# Altium PCB PCB1.PcbDoc
Units mil, origin at the board's own origin, x right, y up, seen from the top; angles counter-clockwise.
Board outline 3990 x 2370 mil, 2 copper layers (Top Layer, Bottom Layer); 9 components, 7 nets, 25 pads, 0 vias.
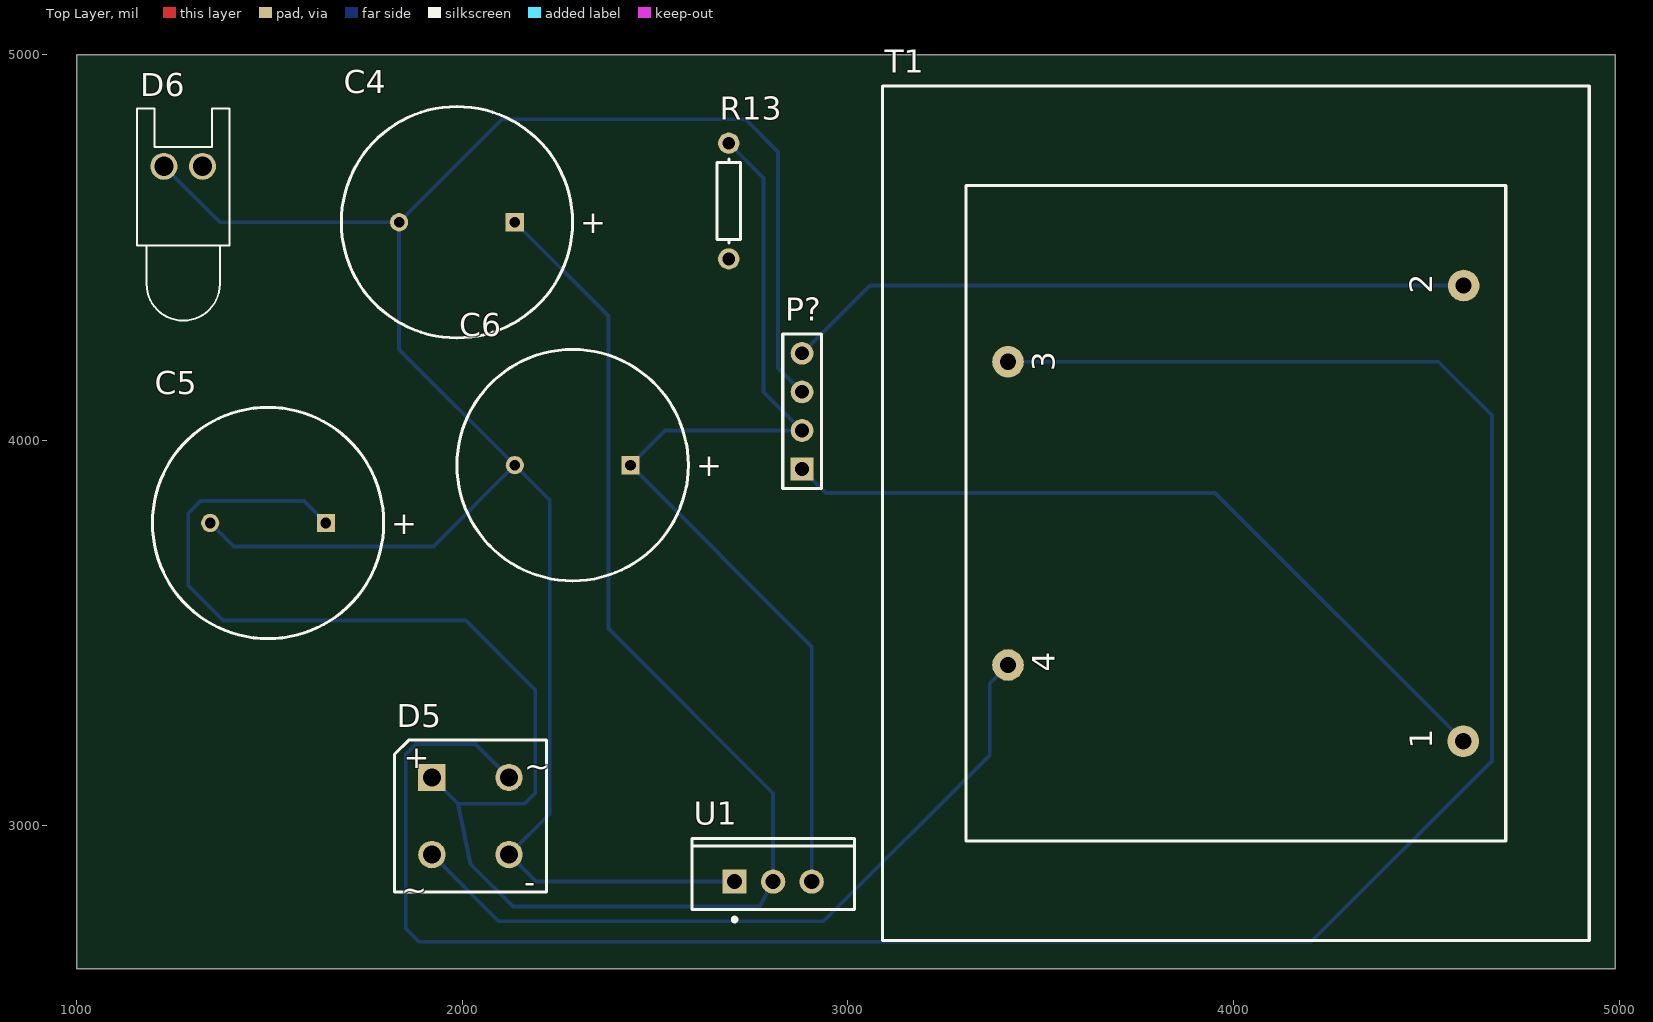
[diagram p0: Top Layer view]
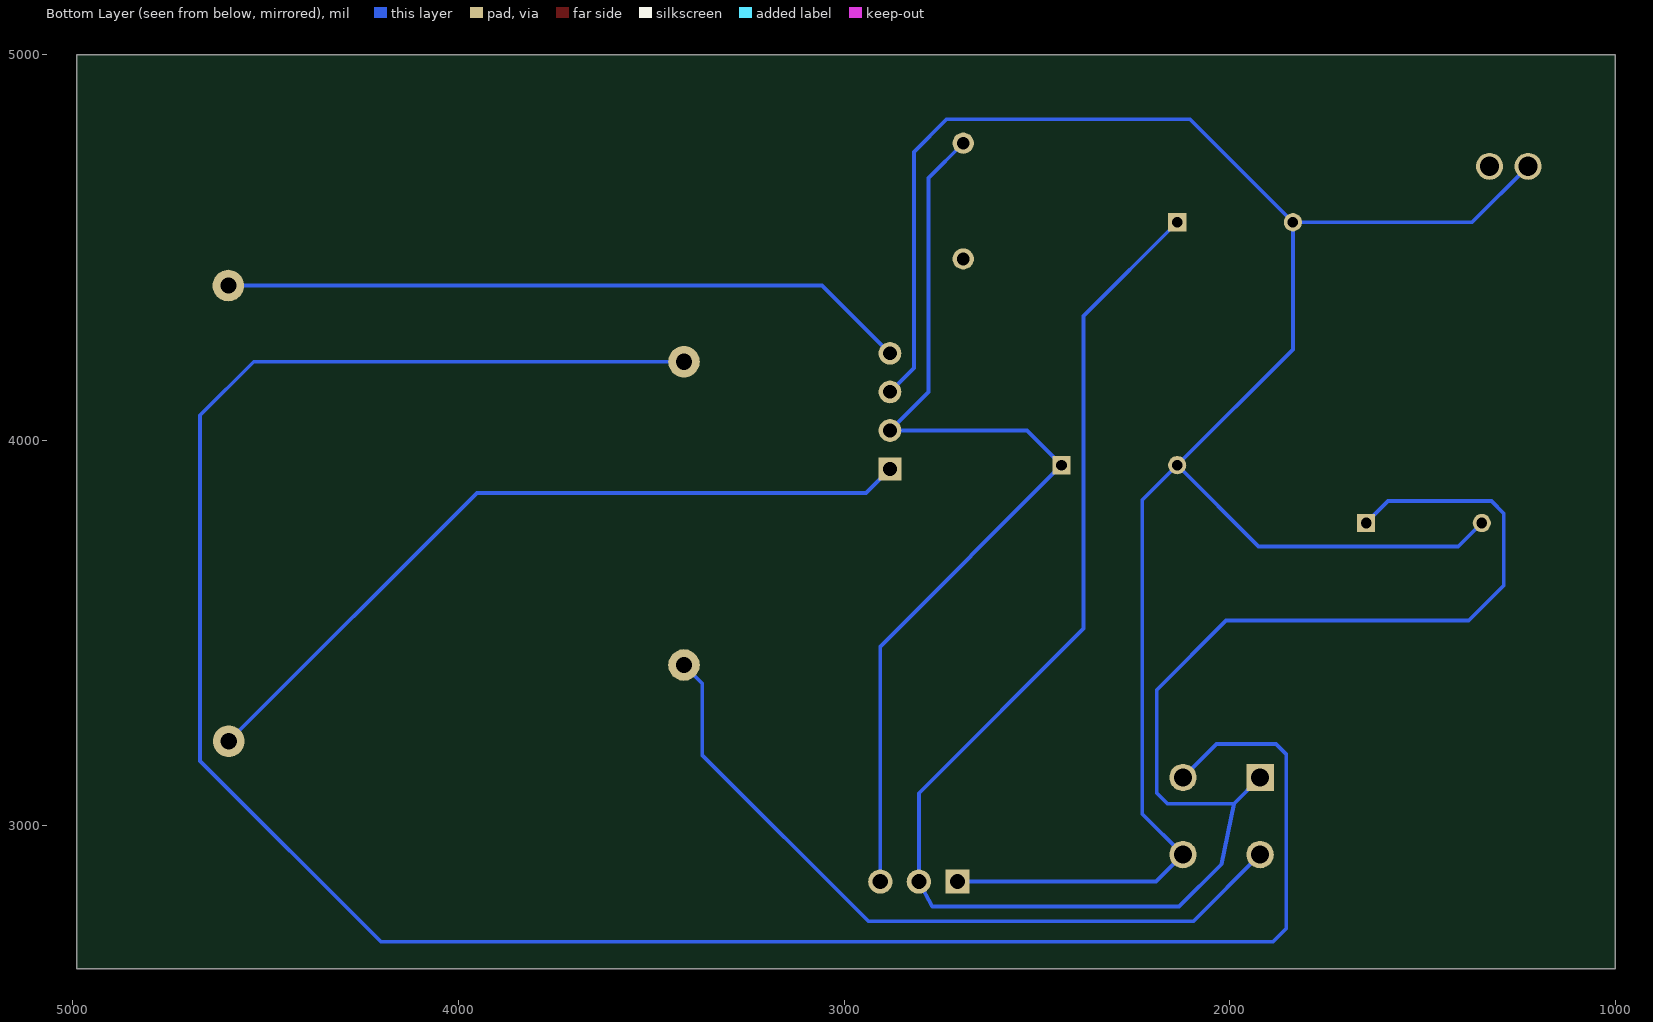
[diagram p1: Bottom Layer view, seen from below]

## Layer stack, top to bottom
Top Solder: solder mask 0.4, Solder Resist, Dk 3.5
Top Layer: signal copper 1.4
Dielectric 1: dielectric 12.6, FR-4, Dk 4.8
Bottom Layer: signal copper 1.4
Bottom Solder: solder mask 0.4, Solder Resist, Dk 3.5

## Board outline
1000,2630 4990,2630 4990,5000 1000,5000

## Design rules (kind name [scope] priority, off if disabled: settings)
Clearance [All] p1: gap=27.56 ignorepadtopadclearanceinfootprint=FALSE
PolygonConnect [All] p1: connectstyle=Direct reliefconductorwidth=10 reliefentries=4 polygonreliefangle="90 Angle" airgapwidth=10
RoomDefinition Sheet1 [InComponentClass('Sheet1')] p1: confinementstyle=ConfineIn formatcopy=TRUE lockcomponents=FALSE outline 1036,2620.67 4991,2620.67 4991,5003.38 1036,5003.38
RoutingLayers [All] p1: top layer_v5=FALSE bottom layer_v5=TRUE
RoutingVias [All] p1: holewidth=28 width=50 viastyle="Through Hole" minholewidth=28 minwidth=50 maxholewidth=28 maxwidth=50
SolderMaskExpansion [All] p1: expansion=4 istentingtop=FALSE
Width [All] p1: maxlimit=10 minlimit=10 preferedwidth=10
29 further rules are at their usual default settings.

## Components (designator, comment, footprint, x,y, rotation, side; value= is the part's Value field where it differs from the comment)
C4 "Cap Pol1" RB7.6-15 1986,4565.67 r0 top value=0.1uF
C5 "Cap Pol1" RB7.6-15 1496,3785.67 r0 top value=470uF
C6 "Cap Pol1" RB7.6-15 2286,3935.67 r0 top value=0.1uF
D5 "Bridge1" D-38 2021,3025.67 r0 top
D6 "LED0" LED-0 1276,4710.67 r0 top
P? "Header 4" HDR1X4 2881,3925.67 r90 top
R13 "Res1" AXIAL-0.3 2691,4620.67 r90 top value=4.7k
T1 "Trans Cupl" TRF_4 4006,3810.67 r90 top
U1 "LM7905CT/NOPB" NDE0003A 2806,2855.67 r0 top

## Footprints (in the part's own frame and the unit in brackets; to place one, negate y for a bottom-side part, rotate by r counter-clockwise, add the part's x,y. Pads: shape width x height; smd on the part's side, far side on the other; paste and mask are expansions set on the pad)
AXIAL-0.3 [mm] "Axial Device, Thru-Hole; 2 Leads; 0.3 in Pin Spacing"
  round 1.4 hole 0.85: 1(-3.81,0) 2(3.81,0)
  silkscreen extent -2.77,-0.76 2.77,0.76
D-38 [mm] "Bridge Rectifier; 4 Terminals; Body 9.4 x 9.4 mm (typ); Pitch 5.08 mm"
  rect 1.8x1.8 hole 1.2: 1(-2.54,2.54)
  round 1.8 hole 1.2: 2(-2.54,-2.54) 3(2.54,-2.54) 4(2.54,2.54)
  silkscreen extent -5,-5 5,5, body extent -5,-5 5,5, height 9.91
HDR1X4 [mm] "Connector; Header; 4 Position"
  rect 1.5x1.5 hole 0.9: 1(0,0)
  round 1.5 hole 0.9: 2(2.54,0) 3(5.08,0) 4(7.62,0)
  silkscreen extent -1.27,-1.27 8.89,1.27
LED-0 [mil] "LED; 2 Leads"
  round 70 hole 50: 1(50,0) 2(-50,0)
  silkscreen extent -120,-400 120,150
NDE0003A [mm] "FM, 3-Leads, Body 10.7x4.7mm, Pitch 2.54mm"
  rect 1.6x1.6 hole 1: 1(-2.54,0)
  round 1.6 hole 1: 2(0,0) 3(2.54,0)
  silkscreen extent -5.35,-2.62 5.35,2.85, body extent -5.4,-1.9 5.4,2.9, height 19.4
RB7.6-15 [mm] "Polarized Capacitor (Radial); 2 Leads"
  rect 1.2x1.2 hole 0.7: 1(3.81,0)
  round 1.2 hole 0.7: 2(-3.81,0)
  silkscreen extent -7.62,-7.62 7.62,7.62
TRF_4 [mil] "Transformer; 4 Leads"
  round 82 hole 42: 1(-590.83,-590) 2(590.83,-590.83) 3(393.33,590.83) 4(-393.33,590.83)
  silkscreen extent -1108,-917 1108,917

## Part data
C4 C5 C6: "Polarized Capacitor (Radial)", LatestRevisionDate=17-Jul-2002, LatestRevisionNote="Re-released for DXP Platform.", PackageDescription="Polarized Capacitor (Radial); 2 Leads", PackageReference=RB7.6-15, Published=8-Jun-2000, Publisher="Altium Limited"
D5: "Full Wave Diode Bridge", DatasheetVersion=E2732B, LatestRevisionDate=29-May-2009, LatestRevisionNote="Sch pins A & K swapped.", PackageDescription="Bridge Rectifier; 4 Terminals; Body 9.4 x 9.4 mm (typ); Pitch 5.08 mm", PackageReference=D-38, Published=8-Jun-2000, Publisher="Altium Limited"
D6: "Typical INFRARED GaAs LED", LatestRevisionDate=08-Jul-2005, LatestRevisionNote="Mech Layer 1 removed.", PackageDescription="LED; 2 Leads", PackageReference=LED-0, Published=8-Jun-2000, Publisher="Altium Limited"
P?: "Header, 4-Pin", LatestRevisionDate=17-Jul-2002, LatestRevisionNote="Re-released for DXP Platform.", Publisher="Altium Limited"
R13: "Resistor", LatestRevisionDate=17-Jul-2002, LatestRevisionNote="Re-released for DXP Platform.", PackageDescription="Axial Device, Thru-Hole; 2 Leads; 0.3 in Pin Spacing", PackageReference=AXIAL-0.3, Published=8-Jun-2000, Publisher="Altium Limited"
T1: "Transformer (Coupled Inductor Model)", LatestRevisionDate=17-Jul-2002, LatestRevisionNote="Re-released for DXP Platform.", PackageDescription="Transformer; 4 Leads", PackageReference=TRF_4, Published=8-Jun-2000, Publisher="Altium Limited"
U1: library part CMP-0062-02481-3, "3-Terminal Negative Regulator, 3-pin TO-220, Pb-Free", Manufacturer="Texas Instruments", PackageTopMarking=NSUZXYTTE#*LM7905CT, PowerWise=N, ComponentLink1Description="Datasheet URL", ComponentLink1URL=http://www.ti.com/general/docs/lit/getliterature.tsp?genericPartNumber=LM7905&fileType=pdf, CompType="LDO IC", PackageDescription="TO-220, Molded, 3 Lead, Straight", PackageReference=NDE0003A, PinCount=3, RoHS=Y

## Nets (pads, with @x,y where several pads share a name; then routed paths per layer and width w, separated by ;. In a path a pad name is that pad's centre, name@x,y a point inside that pad or via, vN(x,y) a via of type N, cw(c..) or ccw(c..) an arc to the next point about the centre after c; other vN are vias at no path point)
"12V Vout": C6.1 P?.2 R13.2 U1.3 | length 2580.7
  Bottom Layer w10: R13.2 2781.35,4680.31 2781.35,4125.31 P?.2 2526,4025.67 C6.1 2906,3465.67 U1.3
"230V Vin": P?.1 T1.1 | length 2007.4
  Bottom Layer w10: P?.1 2943,3863.67 3952.17,3863.67 T1.1
"GND AC": P?.4 T1.2 | length 1788.7
  Bottom Layer w10: P?.4 3056.83,4401.5 T1.2
"GND DC": C4.2 C5.2 C6.2 D5.3 D6.2 P?.3 U1.1 | length 5808.7
  Bottom Layer w10: D6.2 1371,4565.67 C4.2 ; C5.2 1407,3724.67 1925,3724.67 C6.2 ; U1.1 2191,2855.67 D5.3 2226.55,3031.22 2226.55,3845.11 C6.2 ; P?.3 2818.91,4187.75 2818.91,4747.75 2734,4832.67 2103,4832.67 C4.2 ; C4.2 1836,4235.67 C6.2
NetC4_1: C4.1 C5.1 D5.1 U1.2 | length 5185
  Bottom Layer w10: C5.1 1589,3842.67 1321,3842.67 1289,3810.67 1289,3623.67 1380,3532.67 2009,3532.67 2188.99,3352.67 2188.99,3085.67 2160.99,3057.67 1989,3057.67 ; D5.1 1989,3057.67 ; C4.1 2379,4322.67 2379,3511.67 2806,3084.67 U1.2 2771,2790.67 2131,2790.67 2021,2900.67 1989,3057.67
NetD5_2: D5.2 T1.4 | length 1950.4
  Bottom Layer w10: D5.2 2094,2752.67 2937,2752.67 3368,3183.67 3368,3370.17 T1.4
NetD5_4: D5.4 T1.3 | length 6000.7
  Bottom Layer w10: D5.4 2034,3212.67 1880,3212.67 1853,3185.67 1853,2734.67 1888,2699.67 4201,2699.67 4670,3168.67 4670,4065 4531,4204 T1.3
pads on no net: D6.1 R13.1

## Text inside footprints (layer, text, board x,y; h text height)
C4: Top Overlay "+" at 2306.15,4536.66 h59.06
C5: Top Overlay "+" at 1816.15,3756.66 h59.06
C6: Top Overlay "+" at 2606.15,3906.66 h59.06
D5: Top Overlay "+" at 1847.38,3150.23 h59.06; Top Overlay "-" at 2161,2825.67 h59.05; Top Overlay "~" at 1841,2805.67 h59.05; Top Overlay "~" at 2161,3125.67 h59.05
T1: Top Overlay "3" at 3536,4179.83 h59.06 r90; Top Overlay "4" at 3536,3399.83 h59.06 r90; Top Overlay "2" at 4516,4379.83 h59.06 r90; Top Overlay "1" at 4516,3199.83 h59.06 r90